# Altium PCB revA.PcbDoc
Units mil, origin at the board's own origin, x right, y up, seen from the top; angles counter-clockwise.
Board outline 7465 x 8095 mil, 2 copper layers (Top Layer, Bottom Layer); 54 components, 48 nets, 370 pads, 45 vias.
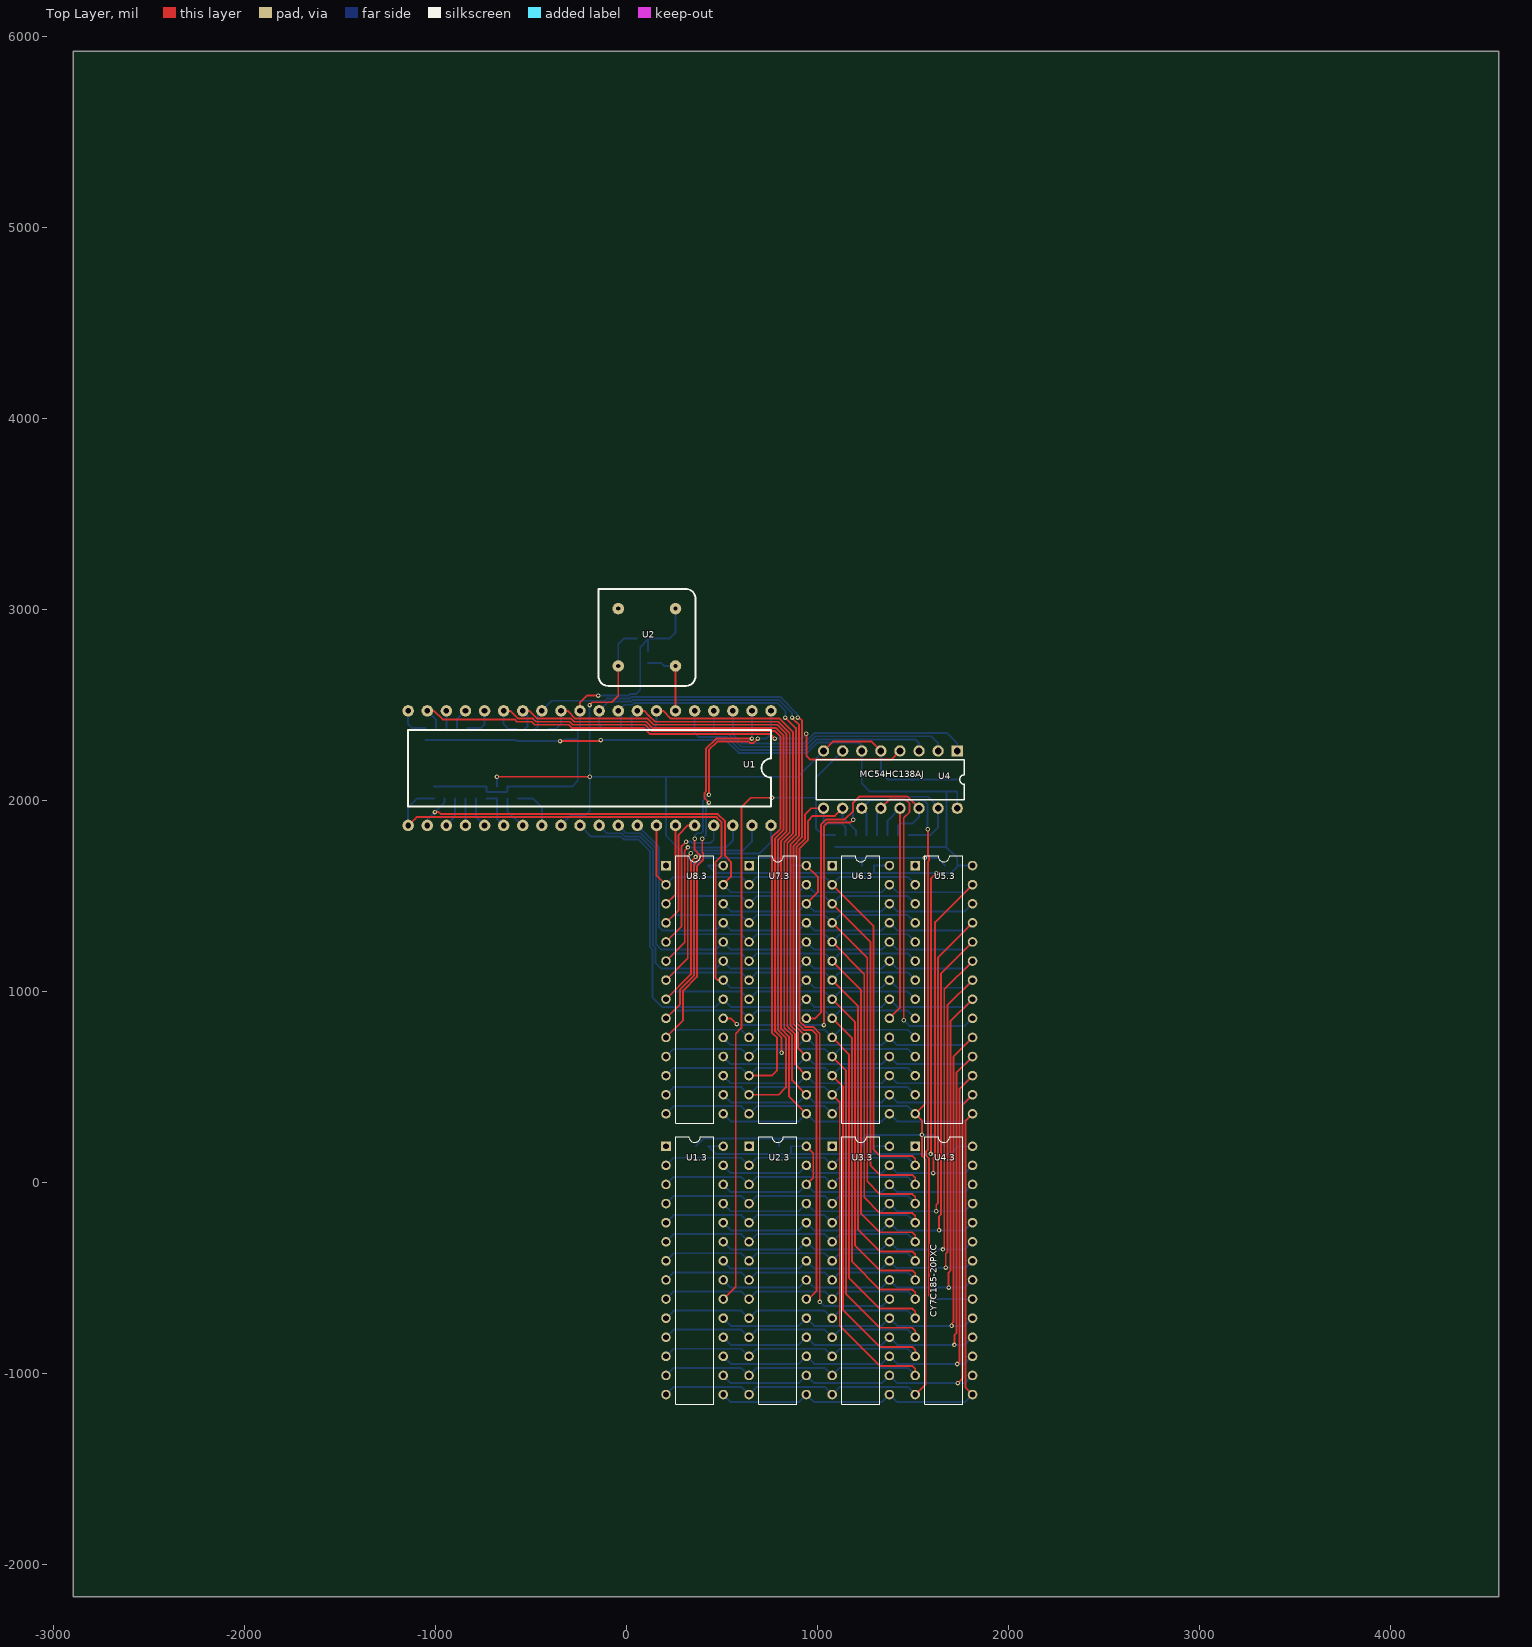
[diagram p0: Top Layer view]
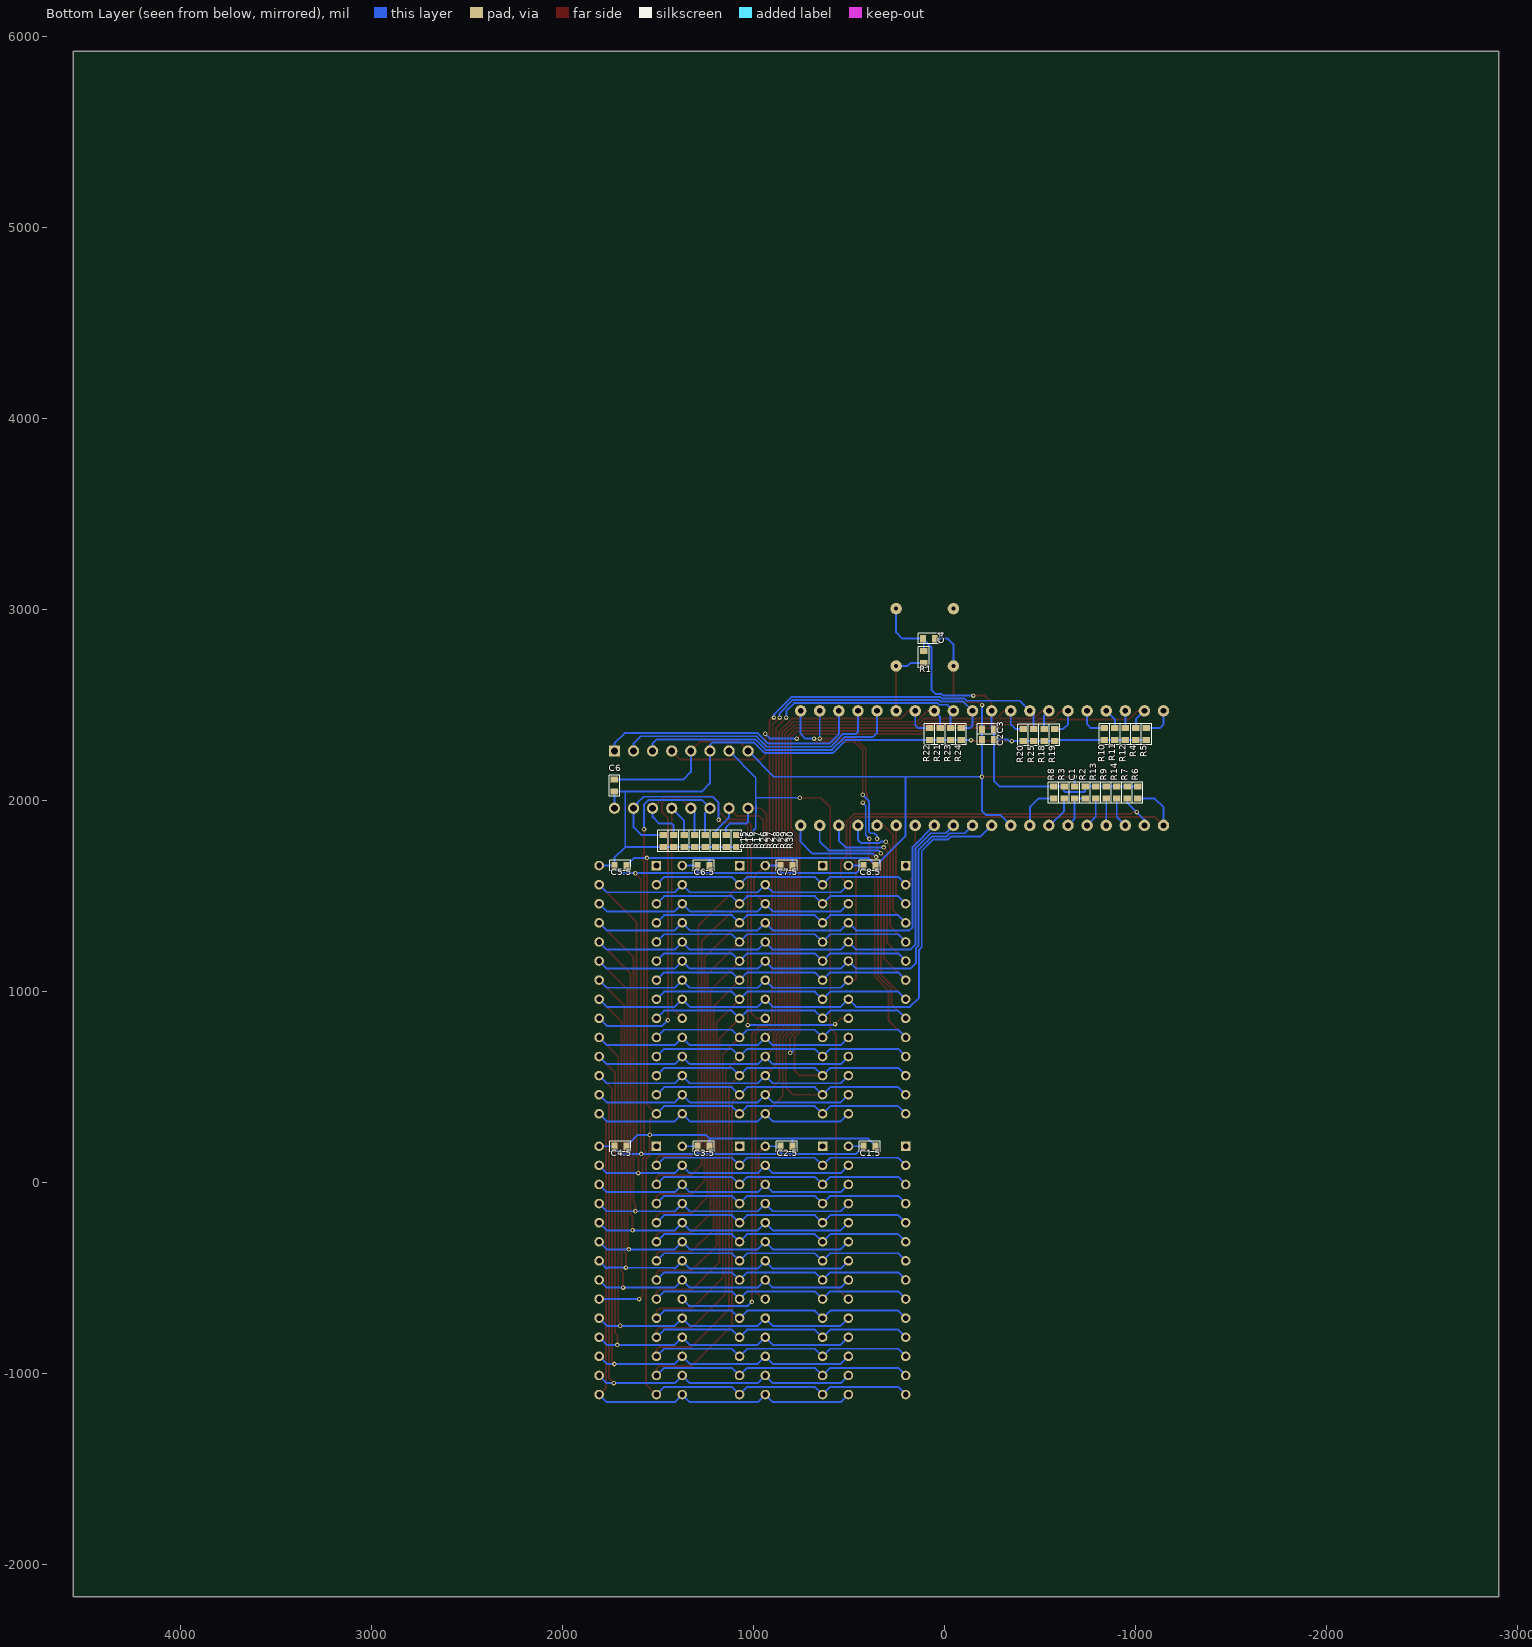
[diagram p1: Bottom Layer view, seen from below]
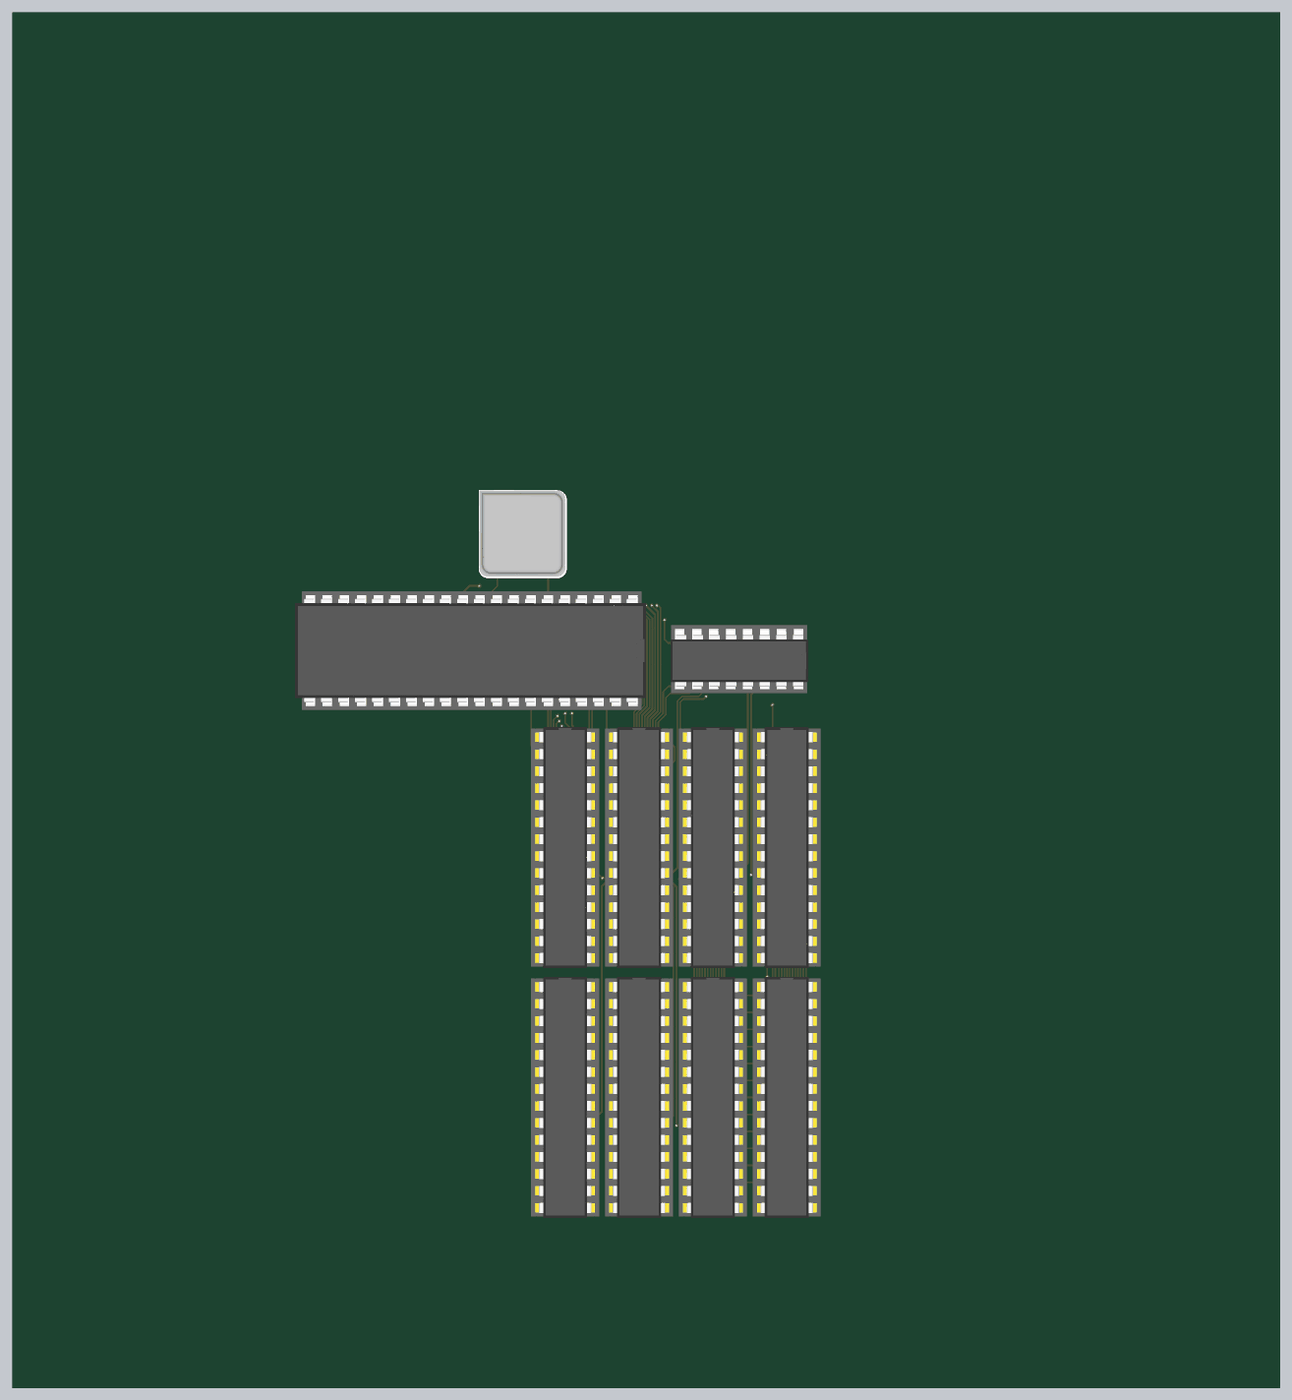
[diagram p2: 3D render of the assembled board from above, using the file's embedded part models]

## Layer stack, top to bottom
Top Solder: solder mask 0.4, Solder Resist, Dk 3.5
Top Layer: signal copper 1.4
Dielectric 1: dielectric 12.6, FR-4, Dk 4.8
Bottom Layer: signal copper 1.4
Bottom Solder: solder mask 0.4, Solder Resist, Dk 3.5

## Board outline
-2900,-2170 4565,-2170 4565,5925 -2900,5925

## Design rules (kind name [scope] priority, off if disabled: settings)
Clearance [All] p1: gap=6 ignorepadtopadclearanceinfootprint=FALSE except(0: Arc-Hole Track-Hole SMDPad-Hole THPad-Hole Via-Hole Fill-Hole Poly-Hole Region-Hole Text-Hole)
ComponentClearance ComponentClearance_1 [InComponent('X1') vs InComponent('X2')] p1: gap=0 collisioncheckmode=3 verticalgap=0 showdistances=FALSE
ComponentClearance [All] p2: gap=10 collisioncheckmode=3 verticalgap=10 showdistances=FALSE
DiffPairsRouting [All] p1: maxlimit=10 minlimit=3.94 mostfreqgap=10 toplayer_minwidth=3.94 toplayer_maxwidth=15 toplayer_prefwidth=15 bottomlayer_minwidth=3.94 bottomlayer_maxwidth=15 bottomlayer_prefwidth=15 maxuncoupledlength=500
HoleSize [All] p1: absolutevalues=TRUE maxlimit=137.8 minlimit=7.87 maxpercent=80.000 minpercent=20.000
MatchedLengths "Schematic Matched Net Lengths_1" [InNetClass('DATA BUS')] p1: tolerance=60 checknetsindiffpair=FALSE checkdiffpairvsdiffpair=TRUE checkxsignals=TRUE checkothers=TRUE
MatchedLengths "Schematic Matched Net Lengths" [InNetClass('ADDRES BUS')] p2: tolerance=60 checknetsindiffpair=FALSE checkdiffpairvsdiffpair=TRUE checkxsignals=TRUE checkothers=TRUE
MatchedLengths [(InNetClass('UART1') OR InNetClass('UART2'))] p3: tolerance=19.68 checknetsindiffpair=FALSE checkdiffpairvsdiffpair=TRUE checkxsignals=TRUE checkothers=TRUE
MinimumSolderMaskSliver [All] p1: minsoldermaskwidth=1.77
PasteMaskExpansion [All] p1: expansion=3.94
PolygonConnect PolygonConnect_2 [All vs OnLayer('VCC')] p1: connectstyle=Direct reliefconductorwidth=10 reliefentries=4 polygonreliefangle="90 Angle" airgapwidth=10
PolygonConnect PolygonConnect_1 [All] p2: connectstyle=Relief reliefconductorwidth=10 reliefentries=4 polygonreliefangle="90 Angle" airgapwidth=10
PolygonConnect [All vs OnLayer('GND')] p3: connectstyle=Direct reliefconductorwidth=10 reliefentries=4 polygonreliefangle="90 Angle" airgapwidth=10
RoutingTopology [All] p1: topology=Daisy_Simple
RoutingVias [All] p1: holewidth=11.81 width=23.62 viastyle="Through Hole" minholewidth=7.87 minwidth=19.68 maxholewidth=19.68 maxwidth=39.37
SilkToSilkClearance [All] p1: silktosilkclearance=3.94
SilkToSolderMaskClearance [IsPad] p1: minsilkscreentomaskgap=3.94 clearancetoexposedcopper=TRUE
SolderMaskExpansion [All] p1: expansion=4
Width [All] p1: maxlimit=59.06 minlimit=3.94 preferedwidth=10 minimp=50.000000 maximp=50.000000 favimp=50.000000
22 further rules are at their usual default settings.

## Classes and differential pairs
net class "DATA BUS": DATA0 DATA1 DATA2 DATA3 DATA4 DATA5 DATA6 DATA7
net class "ADDRES BUS": ADDR0 ADDR1 ADDR2 ADDR3 ADDR4 ADDR5 ADDR6 ADDR7 ADDR8 ADDR9 ADDR10 ADDR11 ADDR12 ADDR13 ADDR14 ADDR15
net class ADDR[0..15]: ADDR0 ADDR1 ADDR2 ADDR3 ADDR4 ADDR5 ADDR6 ADDR7 ADDR8 ADDR9 ADDR10 ADDR11 ADDR12 ADDR13 ADDR14 ADDR15
component class RAM1: C1.5 U1.3
channel class RAM: RAM2 RAM3 RAM4 RAM5 RAM6 RAM7 RAM8
component class RAM8: C8.5 U8.3
component class RAM7: C7.5 U7.3
component class RAM6: C6.5 U6.3
component class RAM4: C4.5 U4.3
component class RAM5: C5.5 U5.3
component class RAM3: C3.5 U3.3
component class RAM2: C2.5 U2.3
component class RAMBUS: C6 R15 R16 R17 R26 R27 R28 R29 R30 U4
net class DATA[0..7]: DATA0 DATA1 DATA2 DATA3 DATA4 DATA5 DATA6 DATA7
component class CPU: C1 C2 C3 C4 R1 R2 R3 R4 R5 R6 R7 R8 R9 R10 R11 R12 R13 R14 R18 R19 R20 R21 R22 R23 R24 R25 U1 U2

## Components (designator, comment, footprint, x,y, rotation, side; value= is the part's Value field where it differs from the comment)
C1 "1uF" "SMD 0603" -680,2072.99 r270 bottom
C1.5 "0.1uF" "SMD 0603" 425,190 r180 bottom (schematic designator C5)
C2 "1uF" "SMD 0603" -194.3,2319.64 r180 bottom
C2.5 "0.1uF" "SMD 0603" 860,190 r180 bottom (schematic designator C5)
C3 "0.1uF" "SMD 0603" -194.01,2374.78 r180 bottom
C3.5 "0.1uF" "SMD 0603" 1295,190 r180 bottom (schematic designator C5)
C4 "0.1uF" "SMD 0603" 51.3,2848.07 r0 bottom
C4.5 "0.1uF" "SMD 0603" 1730,190 r180 bottom (schematic designator C5)
C5.5 "0.1uF" "SMD 0603" 1730,1660 r180 bottom (schematic designator C5)
C6 "0.1uF" "SMD 0603" 1730,2110 r270 bottom
C6.5 "0.1uF" "SMD 0603" 1295,1660 r180 bottom (schematic designator C5)
C7.5 "0.1uF" "SMD 0603" 860,1660 r180 bottom (schematic designator C5)
C8.5 "0.1uF" "SMD 0603" 425,1660 r180 bottom (schematic designator C5)
R1 "330" "SMD 0603" 110.35,2720 r90 bottom
R2 "1k" "SMD 0603" -735,2010 r90 bottom
R3 "10k" "SMD 0603" -625,2010 r90 bottom
R4 "10k" "SMD 0603" -1000,2380 r270 bottom
R5 "10k" "SMD 0603" -1055,2380 r270 bottom
R6 "10k" "SMD 0603" -1010,2010 r90 bottom
R7 "10k" "SMD 0603" -955,2010 r90 bottom
R8 "10k" "SMD 0603" -570,2010 r90 bottom
R9 "10k" "SMD 0603" -845,2010 r90 bottom
R10 "10k" "SMD 0603" -835,2380 r270 bottom
R11 "10k" "SMD 0603" -890,2380 r270 bottom
R12 "10k" "SMD 0603" -945,2380 r270 bottom
R13 "10k" "SMD 0603" -790,2010 r90 bottom
R14 "10k" "SMD 0603" -900,2010 r90 bottom
R15 "10k" "SMD 0603" 1475,1820 r270 bottom
R16 "10k" "SMD 0603" 1420,1820 r270 bottom
R17 "10k" "SMD 0603" 1365,1820 r270 bottom
R18 "10k" "SMD 0603" -520,2375 r270 bottom
R19 "10k" "SMD 0603" -575,2375 r270 bottom
R20 "10k" "SMD 0603" -410,2375 r270 bottom
R21 "10k" "SMD 0603" 25,2380 r270 bottom
R22 "10k" "SMD 0603" 80,2380 r270 bottom
R23 "10k" "SMD 0603" -30,2380 r270 bottom
R24 "10k" "SMD 0603" -85,2380 r270 bottom
R25 "10k" "SMD 0603" -465,2375 r270 bottom
R26 "10k" "SMD 0603" 1310,1820 r270 bottom
R27 "10k" "SMD 0603" 1255,1820 r270 bottom
R28 "10k" "SMD 0603" 1200,1820 r270 bottom
R29 "10k" "SMD 0603" 1145,1820 r270 bottom
R30 "10k" "SMD 0603" 1090,1820 r270 bottom
U1 "Z80" Z80 -195,2170 r270 top
U1.3 "CY7C185-20PXC" DIP-28 355,-460 r0 top value=Value (schematic designator U3)
U2 "50MHz" "XTALL GEN" -45,3005 r270 top
U2.3 "CY7C185-20PXC" DIP-28 790,-460 r0 top value=Value (schematic designator U3)
U3.3 "CY7C185-20PXC" DIP-28 1225,-460 r0 top value=Value (schematic designator U3)
U4 "MC54HC138AJ" 620-09 1380,2110 r180 top
U4.3 "CY7C185-20PXC" DIP-28 1660,-460 r0 top value=Value (schematic designator U3)
U5.3 "CY7C185-20PXC" DIP-28 1660,1010 r0 top value=Value (schematic designator U3)
U6.3 "CY7C185-20PXC" DIP-28 1225,1010 r0 top value=Value (schematic designator U3)
U7.3 "CY7C185-20PXC" DIP-28 790,1010 r0 top value=Value (schematic designator U3)
U8.3 "CY7C185-20PXC" DIP-28 355,1010 r0 top value=Value (schematic designator U3)

## Footprints (in the part's own frame and the unit in brackets; to place one, negate y for a bottom-side part, rotate by r counter-clockwise, add the part's x,y. Pads: shape width x height; smd on the part's side, far side on the other; paste and mask are expansions set on the pad)
620-09 [mm] "DIP; 16 Leads; Row Spacing 7.62 mm; Pitch 2.54 mm"
  rect 1.5x1.5 hole 0.9: 1(-8.89,-3.81)
  round 1.5 hole 0.9: 2(-6.35,-3.81) 3(-3.81,-3.81) 4(-1.27,-3.81) 5(1.27,-3.81) 6(3.81,-3.81) 7(6.35,-3.81) 8(8.89,-3.81) 9(8.89,3.81) 10(6.35,3.81) 11(3.81,3.81) 12(1.27,3.81) 13(-1.27,3.81) 14(-3.81,3.81) 15(-6.35,3.81) 16(-8.89,3.81)
  silkscreen extent -9.85,-2.65 9.85,2.65, body extent -10.3,-5.33 10.3,4.83, height 8.5
DIP-28 [mil]
  rect 50x50 hole 30 mask+4: 1(-150,650)
  round 50 hole 30 mask+4: 2(-150,550) 3(-150,450) 4(-150,350) 5(-150,250) 6(-150,150) 7(-150,50) 8(-150,-50) 9(-150,-150) 10(-150,-250) 11(-150,-350) 12(-150,-450) 13(-150,-550) 14(-150,-650) 15(150,-650) 16(150,-550) 17(150,-450) 18(150,-350) 19(150,-250) 20(150,-150) 21(150,-50) 22(150,50) 23(150,150) 24(150,250) 25(150,350) 26(150,450) 27(150,550) 28(150,650)
  silkscreen extent -100,-700 100,700, body extent -200,-709 200,709, height 370
"SMD 0603" [mm]
  rect 0.8x1 smd: 1(0,0) 2(1.6,0)
  silkscreen extent -0.6,-0.7 2.2,0.7, body extent -0.03,-0.45 1.63,0.45, height 0.46
"XTALL GEN" [mil]
  round 60 hole 21.65: 1(0,0) 4(300,0) 5(300,300) 8(0,300)
  silkscreen extent -104,-104 404,404, body extent -108,-106 400,402, height 240
Z80 [mil] "Dip40"
  round 60 hole 30: 1(-300,950) 2(-300,850) 3(-300,750) 4(-300,650) 5(-300,550) 6(-300,450) 7(-300,350) 8(-300,250) 9(-300,150) 10(-300,50) 11(-300,-50) 12(-300,-150) 13(-300,-250) 14(-300,-350) 15(-300,-450) 16(-300,-550) 17(-300,-650) 18(-300,-750) 19(-300,-850) 20(-300,-950) 21(300,-950) 22(300,-850) 23(300,-750) 24(300,-650) 25(300,-550) 26(300,-450) 27(300,-350) 28(300,-250) 29(300,-150) 30(300,-50) 31(300,50) 32(300,150) 33(300,250) 34(300,350) 35(300,450) 36(300,550) 37(300,650) 38(300,750) 39(300,850) 40(300,950)
  silkscreen extent -200,-950 200,950, body extent -350,-1040 350,1025, height 384

## Part data
C1 C1.5 C2 C2.5 C3 C3.5 C4 C4.5 C5.5 C6 C6.5 C7.5 C8.5: library part Capasitor
R1 R2 R3 R4 R5 R6 R7 R8 R9 R10 R11 R12 R13 R14 R15 R16 R17 R18 R19 R20 R21 R22 R23 R24 R25 R26 R27 R28 R29 R30: library part Resistor
U1: "Zilog CPU"
U1.3 U2.3 U3.3 U4.3 U5.3 U6.3 U7.3 U8.3: "IC SRAM 64KBIT 20NS 28DIP", Built_By=EMA_UL_Team, Manufacturer_Part_Number=CY7C185-20PXC, RefDes=RefDes, Type=DEV, Vendor="Cypress Semiconductor"
U2: library part "XTALL GEN"
U4: "1-of-8 Decoder/Demultiplexer", Code_JEDEC=MS-001-BB, ComponentLink1Description="Manufacturer Link", ComponentLink1URL=http://www.onsemi.com/site/products/parametrics/0,4446,419,00.html, ComponentLink2Description=Datasheet, ComponentLink2URL=http://www.onsemi.com/pub/Collateral/MC74HC138A-D.PDF, DatasheetVersion=1989, LatestRevisionDate=06-Jun-2005, LatestRevisionNote="Stylized 3D Model Added", PackageDescription="DIP; 16 Leads; Row Spacing 7.62 mm; Pitch 2.54 mm", PackageReference=620-09, Published=17-Jul-2002, Publisher="Altium Limited"

## Via types
v1: diameter 23.62, hole 11.81, Top Layer to Bottom Layer, tented both sides, 45 vias

## Nets (pads, with @x,y where several pads share a name; then routed paths per layer and width w, separated by ;. In a path a pad name is that pad's centre, name@x,y a point inside that pad or via, vN(x,y) a via of type N, cw(c..) or ccw(c..) an arc to the next point about the centre after c; other vN are vias at no path point)
\BUSAK: R14.1 U1.23 | length 158.6
  Bottom Layer w10: U1.23 -900,1915 R14.1
\BUSRQ: R13.1 U1.25 | length 158.6
  Bottom Layer w10: R13.1 -790,1915 U1.25
\CS0: R15.1 U4.15 U8.3.20 | length 2599.3
  Top Layer w10: U8.3.20 545,860 v1(575,830) ; v1(1032,825) 1032,1867 1050.18,1885.18 1170.18,1885.18 v1(1185,1900)
  Bottom Layer w10: v1(575,830) 581,824 1031,824 v1(1032,825) ; v1(1185,1900) 1185,1990 1215,2020 1577.63,2020 1609.84,1987.78 1609.84,1980.16 U4.15 1630,1860 1590,1820 R15.1
\CS1: R16.1 U4.14 U7.3.20 | length 1922.3
  Top Layer w10: U7.3.20 985.87,860 1016,890.13 1016,1873.63 1043.56,1901.18 1141.18,1901.18 1185,1945 1185,1990 1216,2021 1466.63,2021 1467.63,2020 1470,2020 U4.14
  Bottom Layer w10: R16.1 1420,1870 1430,1880 1495,1880 1530,1915 U4.14
\CS2: R17.1 U4.13 U6.3.20 | length 1289.7
  Top Layer w10: U6.3.20 1430,915 U4.13
  Bottom Layer w10: R17.1 1365,1895 U4.13
\CS3: R26.1 U4.12 U5.3.20 | length 1861.6
  Top Layer w10: U4.12 1375,2005 1460,2005 1480,1985 1480,1940 1450,1910 v1(1450,850)
  Bottom Layer w10: R26.1 1310,1940 U4.12 ; v1(1450,850) 1480,820 1770,820 U5.3.20
\CS4: R27.1 U4.3.20 U4.11 | length 3349
  Top Layer w10: v1@1575.55,1852.19 1576,1852.19 1576,1716.26 1582.81,1709.45 1582.81,1687.81 1576,1681 1576,171 1567.19,162.19 1567.19,140.55 1582.19,125.55 1582.19,-592.19 v1(1600,-610)
  Bottom Layer w10: R27.1 1255,1935 U4.11 1274,2004 1551,2004 1575,1980 v1(1575,1850) ; v1(1600,-610) U4.3.20
\CS5: R28.1 U3.3.20 U4.10 | length 3371.7
  Top Layer w10: v1(1010,-625) 1010,780 975,815 933.65,815 904,844.65 904,1749 949,1794 949,1894 974.47,1919.47 1089.47,1919.47 U4.10
  Bottom Layer w10: v1(1010,-625) 1031,-646 1339,-646 U3.3.20 ; U4.10 1130,1911.94 1200,1841.94 R28.1
\CS6: R29.1 U2.3.20 U4.9 | length 3003.2
  Top Layer w10: U2.3.20 945,-615 992,-568 992,775.37 968.37,799 927.02,799 888,838.02 888,1755.63 933,1800.63 933,1928 965,1960 U4.9
  Bottom Layer w10: U4.9 1030,1890 1039.21,1880.79 1124.21,1880.79 1145,1860 R29.1
\CS7: R30.1 U1.3.20 U4.7 | length 3603
  Top Layer w10: U1.3.20 570,-545 570,780 600,810 600,1965 650,2015 v1(760,2015)
  Bottom Layer w10: v1(760,2015) 990,2015 ; R30.1 1025,1820 990,1855 990,1942.69 989.47,1943.21 989.47,1976.79 990,1977.31 990,2015 ; U4.7 990,2120 990,2015
\HALT: R12.1 U1.18 | length 90
  Bottom Layer w10: R12.1 U1.18
\INT: R10.1 U1.16 | length 168.3
  Bottom Layer w10: R10.1 -765,2380 -745,2400 U1.16
\IORQ: R5.1 U1.20 | length 168.3
  Bottom Layer w10: U1.20 -1145,2400 -1125,2380 R5.1
\M1: R3.1 U1.27 | length 176.1
  Bottom Layer w10: R3.1 -625,1945 -550,1870 U1.27
\MREQ: R4.1 U1.19 U4.4 | length 2796
  Top Layer w10: U1.19 -1010,2470 -965,2425 -587.63,2425 -575.63,2413 -498.25,2413 -482.25,2397 -304.88,2397 -288.88,2381 89,2381 122.19,2347.81 752.19,2347.81 v1(775,2325) ; v1(940,2350) 940,2235 960,2215 1385,2215 U4.4
  Bottom Layer w10: U1.19 -1000,2425 R4.1 ; v1(775,2325) 915,2325 v1(940,2350)
\NMI: R11.1 U1.17 | length 108.6
  Bottom Layer w10: R11.1 -890,2425 U1.17
\RD: R6.1 U1.3.22 U1.21 U2.3.22 U3.3.22 U4.3.22 U5.3.22 U6.3.22 U7.3.22 U8.3.22 | length 7169
  Top Layer w10: U1.21 -1101,1914 468.37,1914 471.37,1911 471.98,1911 496,1886.98 496,1711 465,1680 465,1070 475,1060 U8.3.22 ; v1(1670,-445) 1670,-372.26 1678,-364.26 1678,928 U5.3.22
  Bottom Layer w10: U1.21 -1145,1965 -1100,2010 R6.1 ; U1.3.22 545,-450 900,-450 U2.3.22 980,-450 1335,-450 U3.3.22 1415,-450 1419,-446 1669,-446 v1(1670,-445) 1765,-445 1770,-450 U4.3.22 ; U8.3.22 545,1020 900,1020 U7.3.22 980,1020 1335,1020 U6.3.22 1415,1020 1770,1020 U5.3.22
\RESET: C1.2 R2.1 U1.26 | length 209.5
  Bottom Layer w10: R2.1 C1.2 -680,1905 U1.26
\RFSH: R8.1 U1.28 | length 238.6
  Bottom Layer w10: R8.1 -490,2010 -445,1965 U1.28
\WAIT: R9.1 U1.24 | length 140
  Bottom Layer w10: U1.24 R9.1
\WR: R7.1 U1.3.27 U1.22 U2.3.27 U3.3.27 U4.3.27 U5.3.27 U6.3.27 U7.3.27 U8.3.27 | length 6481.1
  Top Layer w10: v1(-1005,1940) -985,1940 -975,1930 475,1930 478,1927 478.61,1927 512,1893.61 512,1893 514,1891 514,1711 545,1680 545,1600 U8.3.27 ; v1(1605,50) 1605,127.74 1614,136.74 1614,1364 U5.3.27
  Bottom Layer w10: U1.22 -1045,1900 v1(-1005,1940) -955,1990 R7.1 ; U1.3.27 545,50 900,50 U2.3.27 980,50 1335,50 U3.3.27 1415,50 v1(1605,50) 1770,50 U4.3.27 ; U8.3.27 545,1520 900,1520 U7.3.27 980,1520 1335,1520 U6.3.27 1415,1520 1770,1520 U5.3.27
ADDR0: U1.3.21 U1.30 U2.3.21 U3.3.21 U4.3.21 U5.3.21 U6.3.21 U7.3.21 U8.3.21 | length 5972.4
  Top Layer w10: v1(1685,-550) 1685,-470.95 1694,-461.95 1694,844 U5.3.21
  Bottom Layer w10: U1.30 -188,1813 -33.25,1813 -17.25,1797 60.12,1797 121,1736.12 121,1233.75 135,1219.75 135,968 183,920 465,920 U8.3.21 545,920 900,920 U7.3.21 980,920 1335,920 U6.3.21 1415,920 1770,920 U5.3.21 ; U1.3.21 545,-550 900,-550 U2.3.21 980,-550 1335,-550 U3.3.21 1415,-550 v1(1685,-550) 1770,-550 U4.3.21
ADDR1: U1.3.23 U1.31 U2.3.23 U3.3.23 U4.3.23 U5.3.23 U6.3.23 U7.3.23 U8.3.23 | length 5699.9
  Top Layer w10: v1(1655,-350) 1662,-343 1662,1012 U5.3.23
  Bottom Layer w10: U1.31 -104,1829 -26.63,1829 -10.63,1813 66.75,1813 137,1742.75 137,1240.37 151,1226.37 151,1149 180,1120 465,1120 U8.3.23 545,1120 900,1120 U7.3.23 980,1120 1335,1120 U6.3.23 1415,1120 1770,1120 U5.3.23 ; U1.3.23 545,-350 900,-350 U2.3.23 980,-350 1335,-350 U3.3.23 1415,-350 v1(1655,-350) 1770,-350 U4.3.23
ADDR2: U1.3.24 U1.32 U2.3.24 U3.3.24 U4.3.24 U5.3.24 U6.3.24 U7.3.24 U8.3.24 | length 5521.4
  Top Layer w10: v1(1635,-250) 1635,-177.26 1646,-166.26 1646,1096 U5.3.24
  Bottom Layer w10: U1.32 -4,1829 73.37,1829 153,1749.37 153,1247 180,1220 465,1220 U8.3.24 545,1220 900,1220 U7.3.24 980,1220 1335,1220 U6.3.24 1415,1220 1770,1220 U5.3.24 ; U1.3.24 545,-250 900,-250 U2.3.24 980,-250 1335,-250 U3.3.24 1415,-250 v1(1635,-250) 1770,-250 U4.3.24
ADDR3: U1.3.25 U1.33 U2.3.25 U3.3.25 U4.3.25 U5.3.25 U6.3.25 U7.3.25 U8.3.25 | length 5337.9
  Top Layer w10: v1(1620,-150) 1620,-115 1630,-105 1630,1180 U5.3.25
  Bottom Layer w10: U1.33 169,1756 169,1336 185,1320 465,1320 U8.3.25 545,1320 900,1320 U7.3.25 980,1320 1335,1320 U6.3.25 1415,1320 1770,1320 U5.3.25 ; U1.3.25 545,-150 900,-150 U2.3.25 980,-150 1335,-150 U3.3.25 1415,-150 v1(1620,-150) 1770,-150 U4.3.25
ADDR4: U1.3.2 U1.34 U2.3.2 U3.3.2 U4.3.2 U5.3.2 U6.3.2 U7.3.2 U8.3.2 | length 4893.4
  Top Layer w10: U1.34@145,1870 155,1860 155,1610 U8.3.2 ; U6.3.2 1291,1344 1291,174 1325,140 1495,140 1510,125 U4.3.2
  Bottom Layer w10: U1.3.2 245,130 600,130 U2.3.2 680,130 1035,130 U3.3.2 1115,130 1470,130 U4.3.2 ; U8.3.2 245,1600 600,1600 U7.3.2 680,1600 1035,1600 U6.3.2 1115,1600 1470,1600 U5.3.2
ADDR5: U1.3.3 U1.35 U2.3.3 U3.3.3 U4.3.3 U5.3.3 U6.3.3 U7.3.3 U8.3.3 | length 4993.4
  Top Layer w10: U8.3.3 255,1510 255,1860 U1.35@245,1870 ; U6.3.3 1275,1260 1275,90 1325,40 1495,40 1510,25 U4.3.3
  Bottom Layer w10: U1.3.3 245,30 600,30 U2.3.3 680,30 1035,30 U3.3.3 1115,30 1470,30 U4.3.3 ; U8.3.3 245,1500 600,1500 U7.3.3 680,1500 1035,1500 U6.3.3 1115,1500 1470,1500 U5.3.3
ADDR6: U1.3.4 U1.36 U2.3.4 U3.3.4 U4.3.4 U5.3.4 U6.3.4 U7.3.4 U8.3.4 | length 5151.2
  Top Layer w10: U8.3.4 271,1426 271,1821 320,1870 U1.36 ; U6.3.4 1259,1176 1259,6 1325,-60 1495,-60 1510,-75 U4.3.4
  Bottom Layer w10: U1.3.4 245,-70 600,-70 U2.3.4 680,-70 1035,-70 U3.3.4 1115,-70 1470,-70 U4.3.4 ; U8.3.4 245,1400 600,1400 U7.3.4 680,1400 1035,1400 U6.3.4 1115,1400 1470,1400 U5.3.4
ADDR7: U1.3.5 U1.37 U2.3.5 U3.3.5 U4.3.5 U5.3.5 U6.3.5 U7.3.5 U8.3.5 | length 5357.7
  Top Layer w10: U8.3.5 287,1342 287,1762 v1(310,1785) ; U6.3.5 1243,1092 1243,-78 1325,-160 1495,-160 1510,-175 U4.3.5
  Bottom Layer w10: U1.3.5 245,-170 600,-170 U2.3.5 680,-170 1035,-170 U3.3.5 1115,-170 1470,-170 U4.3.5 ; U8.3.5 245,1300 600,1300 U7.3.5 680,1300 1035,1300 U6.3.5 1115,1300 1470,1300 U5.3.5 ; v1(310,1785) 335,1785 342.81,1777.19 437.19,1777.19 455,1795 U1.37
ADDR8: U1.3.6 U1.38 U2.3.6 U3.3.6 U4.3.6 U5.3.6 U6.3.6 U7.3.6 U8.3.6 | length 5530.7
  Top Layer w10: U8.3.6 303,1258 303,1724.63 303.19,1724.82 303.19,1738.19 v1(320,1755) ; U6.3.6 1227,1008 1227,-162 1325,-260 1495,-260 1510,-275 U4.3.6
  Bottom Layer w10: U1.3.6 245,-270 600,-270 U2.3.6 680,-270 1035,-270 U3.3.6 1115,-270 1470,-270 U4.3.6 ; U8.3.6 245,1200 600,1200 U7.3.6 680,1200 1035,1200 U6.3.6 1115,1200 1470,1200 U5.3.6 ; v1(320,1755) 520,1755 555,1790 U1.38
ADDR9: U1.3.7 U1.39 U2.3.7 U3.3.7 U4.3.7 U5.3.7 U6.3.7 U7.3.7 U8.3.7 | length 5707.3
  Top Layer w10: U8.3.7 319,1174 319,1709 v1(335,1725) ; U6.3.7 1211,924 1211,-246 1325,-360 1495,-360 1510,-375 U4.3.7
  Bottom Layer w10: U1.3.7 245,-370 600,-370 U2.3.7 680,-370 1035,-370 U3.3.7 1115,-370 1470,-370 U4.3.7 ; U8.3.7 245,1100 600,1100 U7.3.7 680,1100 1035,1100 U6.3.7 1115,1100 1470,1100 U5.3.7 ; v1(335,1725) 349,1739 609,1739 655,1785 U1.39
ADDR10: U1.3.8 U1.40 U2.3.8 U3.3.8 U4.3.8 U5.3.8 U6.3.8 U7.3.8 U8.3.8 | length 5880.9
  Top Layer w10: U8.3.8 335,1090 335,1680 v1(360,1705) ; U6.3.8 1195,840 1195,-330 1325,-460 1495,-460 1510,-475 U4.3.8
  Bottom Layer w10: U1.3.8 245,-470 600,-470 U2.3.8 680,-470 1035,-470 U3.3.8 1115,-470 1470,-470 U4.3.8 ; U8.3.8 245,1000 600,1000 U7.3.8 680,1000 1035,1000 U6.3.8 1115,1000 1470,1000 U5.3.8 ; v1(360,1705) 378,1723 693,1723 755,1785 U1.40
ADDR11: U1.1 U1.3.9 U2.3.9 U3.3.9 U4.3.9 U5.3.9 U6.3.9 U7.3.9 U8.3.9 | length 6578.7
  Top Layer w10: U8.3.9 279,934 279,1011.37 351,1083.37 351,1663.74 382.81,1695.55 382.81,1715 355,1742.81 v1(355,1800) ; v1(430,2030) 430,2265 474,2309 638.74,2309 645.55,2302.19 664.45,2302.19 685,2322.74 v1(685,2325) ; U6.3.9 1179,756 1179,-414 1325,-560 1495,-560 1510,-575 U4.3.9
  Bottom Layer w10: U1.3.9 245,-570 600,-570 U2.3.9 680,-570 1035,-570 U3.3.9 1115,-570 1470,-570 U4.3.9 ; U8.3.9 245,900 600,900 U7.3.9 680,900 1035,900 U6.3.9 1115,900 1470,900 U5.3.9 ; v1(355,1800) 355,1815 369,1829 389,1829 398,1838 398,1998 v1(430,2030) ; v1(685,2325) 730,2325 755,2350 U1.1
ADDR12: U1.2 U1.3.10 U2.3.10 U3.3.10 U4.3.10 U5.3.10 U6.3.10 U7.3.10 U8.3.10 | length 6587.9
  Top Layer w10: U8.3.10 295,850 295,1004.75 367,1076.75 367,1657 400,1690 400,1725 395,1730 v1(395,1800) ; v1(430,1990) 407.19,2012.81 407.19,2039.45 414,2046.26 414,2271.63 467.37,2325 v1(655,2325) ; U6.3.10 1163,672 1163,-498 1325,-660 1495,-660 1510,-675 U4.3.10
  Bottom Layer w10: U1.3.10 245,-670 600,-670 U2.3.10 680,-670 1035,-670 U3.3.10 1115,-670 1470,-670 U4.3.10 ; U8.3.10 245,800 600,800 U7.3.10 680,800 1035,800 U6.3.10 1115,800 1470,800 U5.3.10 ; v1(395,1800) 414,1819 414,1974 v1(430,1990) ; v1(655,2325) U1.2
ADDR13: U1.3 U4.1 | length 1402.5
  Bottom Layer w10: U1.3 555,2347.88 604.88,2298 925.12,2298 980.12,2353 1677,2353 1730,2300 U4.1
ADDR14: U1.4 U4.2 | length 1395.4
  Bottom Layer w10: U1.4 455,2360 465.99,2349.01 531.25,2349.01 598.25,2282 931.75,2282 986.75,2337 1593,2337 1630,2300 U4.2
ADDR15: U1.5 U4.3 | length 1398.3
  Bottom Layer w10: U1.5 355,2355 376.99,2333.01 524.62,2333.01 591.63,2266 938.37,2266 993.37,2321 1509,2321 1530,2300 U4.3
CLK: R1.1 U1.6 U2.5 | length 385.9
  Top Layer w10: U1.6 U2.5
  Bottom Layer w10: R1.1 170,2720 180,2720 195,2705 U2.5
DATA0: R18.1 U1.3.11 U1.14 U2.3.11 U3.3.11 U4.3.11 U5.3.11 U6.3.11 U7.3.11 U8.3.11 | length 7816.1
  Top Layer w10: U1.14 -510,2470 -469,2429 -291.63,2429 -275.63,2413 101.75,2413 102.25,2413 134.25,2381 780.12,2381 821,2340.12 821,1847.02 776,1802.02 776,791.63 810,757.63 810,699 v1(810,680) ; U6.3.11 1147,588 1147,-582 1325,-760 1495,-760 1510,-775 U4.3.11
  Bottom Layer w10: U1.14 -520,2445 -520,2390 R18.1@-535,2375 ; U1.3.11 245,-770 600,-770 U2.3.11 680,-770 1035,-770 U3.3.11 1115,-770 1470,-770 U4.3.11 ; U8.3.11 245,700 600,700 U7.3.11 680,700 785,700 ; v1(810,680) 805,680 785,700 ; U5.3.11 1470,700 1115,700 U6.3.11 1035,700 785,700
DATA1: R19.1 U1.3.12 U1.15 U2.3.12 U3.3.12 U4.3.12 U5.3.12 U6.3.12 U7.3.12 U8.3.12 | length 8150.1
  Top Layer w10: U1.15 -610,2470 -569,2429 -491.63,2429 -475.63,2413 -298.25,2413 -282.25,2397 95.12,2397 95.63,2397 127.63,2365 773.49,2365 805,2333.49 805,1853.65 760,1808.65 760,785 787.19,757.81 787.19,702.19 787.19,587.19 760,560 U7.3.12 ; U6.3.12 1131,504 1131,-666 1325,-860 1495,-860 1510,-875 U4.3.12
  Bottom Layer w10: U1.15 -645,2400 -620,2375 R19.1 ; U1.3.12 245,-870 600,-870 U2.3.12 680,-870 1035,-870 U3.3.12 1115,-870 1470,-870 U4.3.12 ; U8.3.12 245,600 600,600 U7.3.12 680,600 1035,600 U6.3.12 1115,600 1470,600 U5.3.12
DATA2: R20.1 U1.3.13 U1.12 U2.3.13 U3.3.13 U4.3.13 U5.3.13 U6.3.13 U7.3.13 U8.3.13 | length 8029.9
  Top Layer w10: U1.12 -310,2470 -269,2429 108.37,2429 108.88,2429 140.88,2397 786.75,2397 837,2346.75 837,1840.39 792,1795.39 792,798.25 832.81,757.44 832.81,497.81 795,460 U7.3.13 ; U6.3.13 1115,420 1115,-750 1325,-960 1495,-960 1510,-975 U4.3.13
  Bottom Layer w10: R20.1 -370,2375 -345,2400 U1.12 ; U1.3.13 245,-970 600,-970 U2.3.13 680,-970 1035,-970 U3.3.13 1115,-970 1470,-970 U4.3.13 ; U8.3.13 245,500 600,500 U7.3.13 680,500 1035,500 U6.3.13 1115,500 1470,500 U5.3.13
DATA3: R21.1 U1.3.15 U1.8 U2.3.15 U3.3.15 U4.3.15 U5.3.15 U6.3.15 U7.3.15 U8.3.15 | length 7324.1
  Top Layer w10: U1.8 90,2470 115,2445 115.51,2445 147.51,2413 793.37,2413 853,2353.37 853,1833.76 808,1788.76 808,804.88 848.81,764.07 848.81,451.19 U7.3.15 ; U4.3.15 1774,-1074 1774,324 U5.3.15
  Bottom Layer w10: R21.1 25,2440 U1.8 ; U1.3.15 545,-1150 900,-1150 U2.3.15 980,-1150 1335,-1150 U3.3.15 1415,-1150 1770,-1150 U4.3.15 ; U8.3.15 545,320 900,320 U7.3.15 980,320 1335,320 U6.3.15 1415,320 1770,320 U5.3.15
DATA4: R22.1 U1.3.16 U1.7 U2.3.16 U3.3.16 U4.3.16 U5.3.16 U6.3.16 U7.3.16 U8.3.16 | length 7233.2
  Top Layer w10: U1.7 182.88,2470 190,2470 231,2429 800,2429 869,2360 869,1827.14 824,1782.14 824,811.51 864.81,770.7 864.81,535.19 U7.3.16 ; v1(1733,-1050) 1758,-1025 1758,408 U5.3.16
  Bottom Layer w10: R22.1 140,2380 155,2395 U1.7 ; U1.3.16 545,-1050 900,-1050 U2.3.16 980,-1050 1335,-1050 U3.3.16 1415,-1050 v1(1733,-1050) 1770,-1050 U4.3.16 ; U8.3.16 545,420 900,420 U7.3.16 980,420 1335,420 U6.3.16 1415,420 1770,420 U5.3.16
DATA5: R23.1 U1.3.17 U1.9 U2.3.17 U3.3.17 U4.3.17 U5.3.17 U6.3.17 U7.3.17 U8.3.17 | length 7350
  Top Layer w10: v1(830,2435) 885,2380 885,1820.51 840,1775.51 840,818.14 880.81,777.33 880.81,619.19 U7.3.17 ; v1(1730,-950) 1742,-938 1742,492 U5.3.17
  Bottom Layer w10: R23.1 -30,2455 U1.9 -13,2502 29.02,2502 38.02,2511 789,2511 830,2470 v1(830,2435) ; U1.3.17 545,-950 900,-950 U2.3.17 980,-950 1335,-950 U3.3.17 1415,-950 v1(1730,-950) 1770,-950 U4.3.17 ; U8.3.17 545,520 900,520 U7.3.17 980,520 1335,520 U6.3.17 1415,520 1770,520 U5.3.17
DATA6: R24.1 U1.3.18 U1.10 U2.3.18 U3.3.18 U4.3.18 U5.3.18 U6.3.18 U7.3.18 U8.3.18 | length 7429
  Top Layer w10: v1(865,2435) 872.19,2427.81 872.19,2425.55 885.55,2412.19 887.81,2412.19 901,2399 901,1813.88 856,1768.88 856,824.76 896.81,783.95 896.81,703.19 U7.3.18 ; v1(1715,-850) 1715,-800 1726,-789 1726,576 U5.3.18
  Bottom Layer w10: R24.1 -130,2380 -145,2395 U1.10 -97,2518 22.39,2518 31.39,2527 795.63,2527 865,2457.63 v1(865,2435) ; U1.3.18 545,-850 900,-850 U2.3.18 980,-850 1335,-850 U3.3.18 1415,-850 v1(1715,-850) 1770,-850 U4.3.18 ; U8.3.18 545,620 900,620 U7.3.18 980,620 1335,620 U6.3.18 1415,620 1770,620 U5.3.18
DATA7: R25.1 U1.3.19 U1.13 U2.3.19 U3.3.19 U4.3.19 U5.3.19 U6.3.19 U7.3.19 U8.3.19 | length 7630.9
  Top Layer w10: v1@898.69,2438.69 917,2420.37 917,1807.25 872,1762.25 872,831.39 935,768.39 935,765 U7.3.19 ; v1(1700,-750) 1700,-740 1710,-730 1710,660 U5.3.19
  Bottom Layer w10: R25.1@-480,2375 -465,2390 -465,2450 U1.13 -392.19,2522.81 -114.82,2522.81 -103.63,2534 15.76,2534 24.76,2543 802.25,2543 895,2450.25 v1(895,2435) ; U1.3.19 545,-750 900,-750 U2.3.19 980,-750 1335,-750 U3.3.19 1415,-750 v1(1700,-750) 1770,-750 U4.3.19 ; U8.3.19 545,720 900,720 U7.3.19 980,720 1335,720 U6.3.19 1415,720 1770,720 U5.3.19
GND: C1.1 C1.5.2 C2.1 C2.5.2 C3.1 C3.5.2 C4.1 C4.5.2 C5.5.2 C6.1 C6.5.2 C7.5.2 C8.5.2 U1.3.14 U1.29 U2.3.14 U2.4 U3.3.14 U4.3.14 U4.5 U4.8 U5.3.14 U6.3.14 U7.3.14 U8.3.14 | length 13038.9
  Top Layer w10: v1(-680,2125) v1(-194.04,2125) ; v1(-195,2500) -180,2515 -80,2515 -45,2550 U2.4 ; U4.8 1080,2310 1280,2310 U4.5 ; U4.3.14 1565,-1055 1565,120.11 1546,139.11 1546,249 v1(1545,250) 1545,325 U5.3.14 1560,410 v1(1560,1700)
  Bottom Layer w10: C1.1 v1(-680,2125) ; U1.29 -290,1925 -215,1925 -194.04,1945.96 v1(-194.04,2125) ; v1(-195,2500) -195,2375.74 C3.1 v1(-194.04,2125) ; U2.4 -45,2819.18 -16.11,2848.07 C4.1 ; U1.3.14 245,-1070 600,-1070 U2.3.14 680,-1070 1035,-1070 U3.3.14 1115,-1070 1470,-1070 U4.3.14 ; U8.3.14 245,400 600,400 U7.3.14 680,400 1035,400 U6.3.14 1115,400 1470,400 U5.3.14 ; C1.5.2 402.01,230 797.01,230 ; C2.5.2 797.01,230 ; C7.5.2 797.01,1700 ; U4.8 895,2125 205,2125 ; C3.5.2 1232.01,230 ; C6.5.2 1232.01,1700 ; U4.5 1330,2150 1370,2110 C6.1 ; C4.5.2 1607.01,250 v1(1545,250) 1252.01,250 1232.01,230 ; C5.5.2 1627.01,1700 v1(1560,1700) 1232.01,1700 ; v1(-194.04,2125) 205,2125 ; 205,2125 205,1817.01 C8.5.2 402.01,1700 797.01,1700 ; 797.01,230 1232.01,230 ; 797.01,1700 1232.01,1700
VCC: C1.5.1 C2.2 C2.5.1 C3.2 C3.5.1 C4.2 C4.5.1 C5.5.1 C6.2 C6.5.1 C7.5.1 C8.5.1 R1.2 R2.2 R3.2 R4.2 R5.2 R6.2 R7.2 R8.2 R9.2 R10.2 R11.2 R12.2 R13.2 R14.2 R15.2 R16.2 R17.2 R18.2 R19.2 R20.2 R21.2 R22.2 R23.2 R24.2 R25.2 R26.2 R27.2 R28.2 R29.2 R30.2 U1.3.26 U1.3.28 U1.11 U2.3.26 U2.3.28 U2.8 U3.3.26 U3.3.28 U4.3.26 U4.3.28 U4.6 U4.16 U5.3.26 U5.3.28 U6.3.26 U6.3.28 U7.3.26 U7.3.28 U8.3.26 U8.3.28 | length 14683.4
  Top Layer w10: v1(-350,2312.01) -142.01,2312.01 v1(-137.01,2317.01) ; U1.11 -245,2515 -210,2550 v1(-150,2550) ; U2.3.26 976,26 976,154 U2.3.28 ; U7.3.26 1000,1520 1000,1600 U7.3.28 ; v1(1590,150) 1592,152 1592,1592 v1(1620,1620)
  Bottom Layer w10: R5.2 R4.2 R12.2 R11.2 R10.2 -580,2317.01 R19.2 R18.2 R25.2 R20.2 v1(-350,2312.01) -337.99,2312.01 -330.36,2319.64 C2.2 ; R6.2 R7.2 R14.2 R9.2 R13.2 R2.2 -735,2050 -730,2045 -630,2045 -625,2050 R3.2 R8.2 -287.01,2072.99 -257.29,2102.71 C2.2 ; C3.2 -257.29,2374.5 C2.2 ; C3.2@-245,2374.78 U1.11 ; v1(-150,2550) 9.14,2550 18.14,2559 49,2559 70,2580 70,2803.78 C4.2@110.35,2844.14 ; v1(-137.01,2317.01) R24.2 R23.2 R21.2 R22.2 517.99,2317.01 585,2250 945,2250 1000,2305 1215,2305 1230,2290 U4.6 1230,2090 1272.99,2047.01 1673.43,2047.01 ; R1.2 C4.2@110.35,2844.14 ; U2.8 255,2880.53 222.54,2848.07 C4.2 C4.2@110.35,2844.14 ; U1.3.26 545,-50 900,-50 U2.3.26 980,-50 1335,-50 U3.3.26 1415,-50 1770,-50 U4.3.26 ; U1.3.28 C1.5.1 465,150 1295,150 ; U8.3.26 545,1420 900,1420 U7.3.26 980,1420 1335,1420 U6.3.26 1415,1420 1770,1420 U5.3.26 ; U8.3.28 C8.5.1 465,1620 860,1620 ; 860,150 C2.5.1 U2.3.28 ; U7.3.28 C7.5.1 860,1620 ; R30.2 R29.2 R28.2 R27.2 R26.2 R17.2 R16.2 R15.2 1673.66,1757.01 ; U3.3.28 C3.5.1 1295,150 ; U6.3.28 C6.5.1 1295,1620 ; C5.5.1 1730,1700.66 1673.66,1757.01 ; U4.16 C6.2 1673.43,2047.01 ; U4.3.28 1735,190 1695,150 v1(1590,150) 1295,150 ; U5.3.28 1735,1660 1695,1620 v1(1620,1620) 1295,1620 ; 860,1620 1295,1620 ; 1673.43,2047.01 1673.43,1757.23 1673.66,1757.01
pads on no net: U1.3.1 U2.1 U2.3.1 U3.3.1 U4.3.1 U5.3.1 U6.3.1 U7.3.1 U8.3.1

## Silkscreen, mask and mechanical layers (free items; w line width, h text height)
Board:
  the board outline again, w10